# EAGLE board MainNode328V1.0 Rev final (EAGLE 7.1.0)
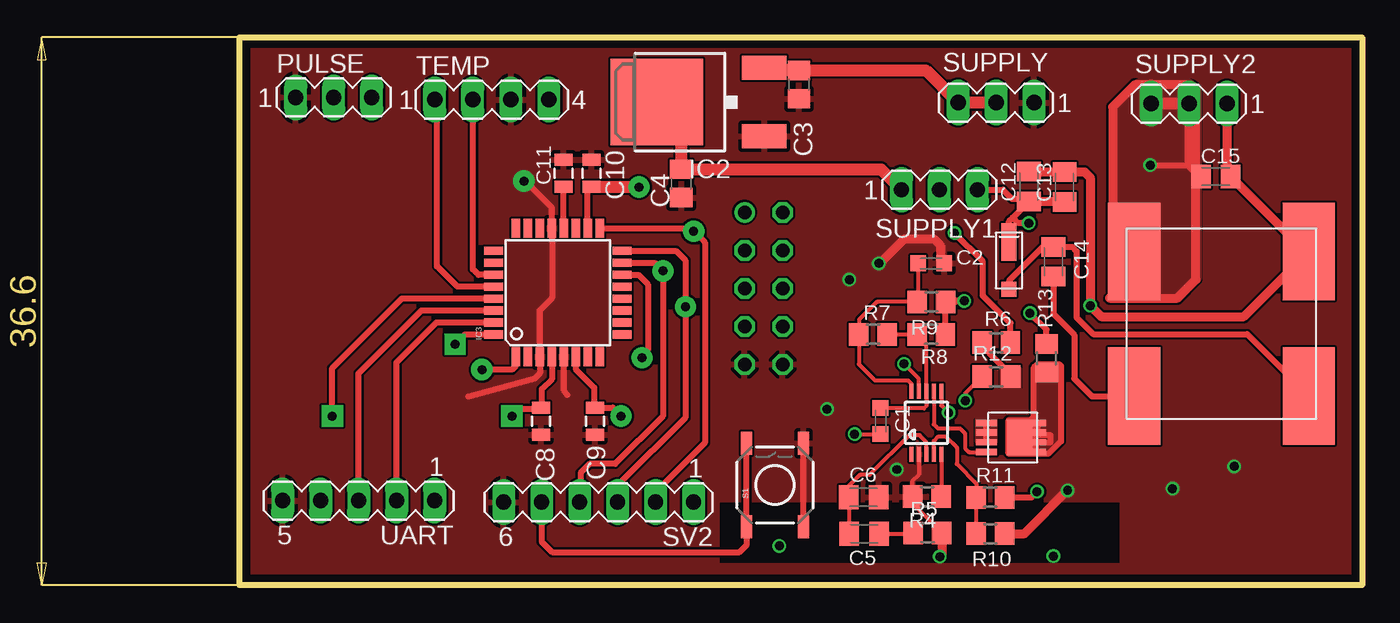
[diagram p0: board, top side]
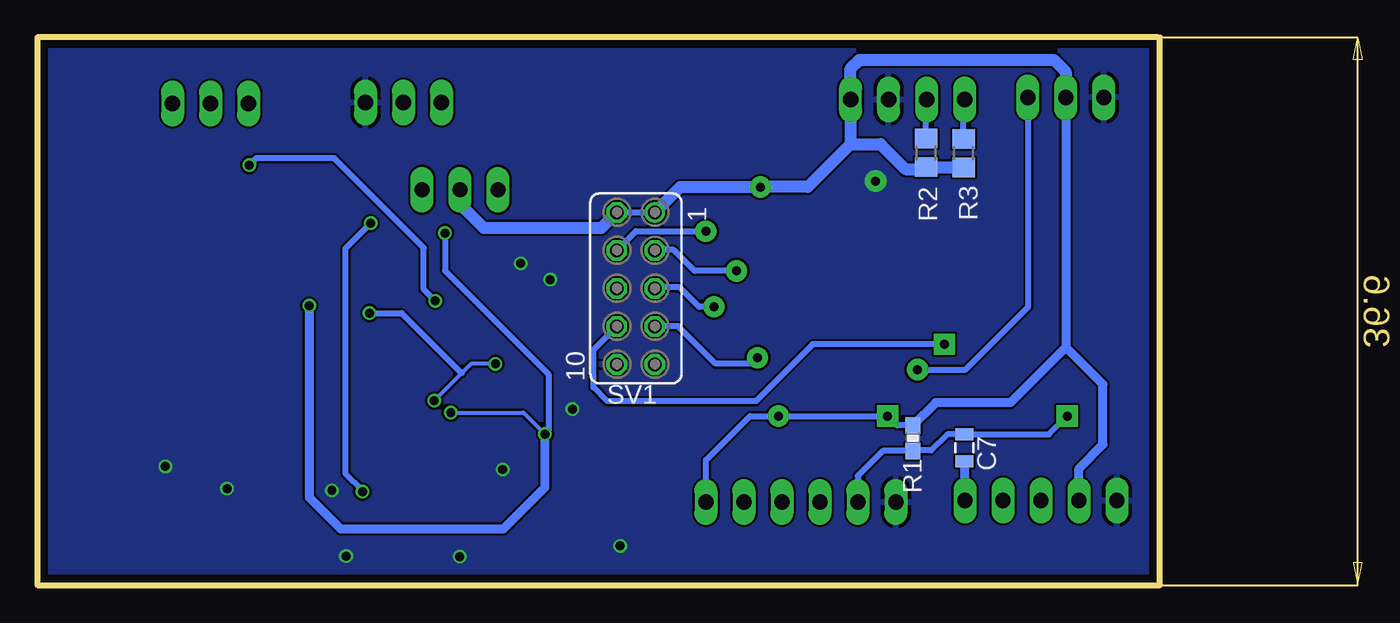
[diagram p1: board, bottom side, seen from below]

Size 75.04 x 36.6 mm. Coordinates in mm from the lower left corner, seen from the top.
Outline: 0,0.5 0,36.6 0,0 75.03,0 75.03,36.6 0.1,36.6
Copper layers (1*16): Top 0.035mm / dielectric 1.6mm / Bottom 0.035mm
Design rules "Elecrow_2-layer_PCB_eagle_rule": minimum track width 6mil, minimum drill 12mil, track to track 6mil, track to pad 8mil, pad to pad 12mil, via to via 12mil, smd to smd 0mil, copper to edge 20mil, drill to drill 10mil, minimum pad ring 6mil, minimum via ring 6mil, stop-mask expansion 0mil, vias tented up to drill 100mil, thermal gap 10mil
tRestrict: area 32.1,1.5 to 58.8,5.5

## Footprints (pad centres in the part's own frame; a part is rotated, then mirrored left to right if it is on the bottom)
C0603K = smd 1.05 x 1.08: 1 -0.875,0; 2 0.875,0
C0805 = smd 1.3 x 1.5: 1 -0.95,0; 2 0.95,0
C0805K = smd 1.3 x 1.6: 1 -1,0; 2 1,0
0805 = smd 0.8 x 1.2: 1 -0.9,0; 2 0.9,0
DPACK = smd 1.6 x 3: 1 -2.28,-4.8; 3 2.28,-4.8 | smd 5.8 x 6.2: 2 0,2.38
TQFP32-08 = smd 1.27 x 0.559: 1 -4.293,2.8; 2 -4.293,2; 3 -4.293,1.2; 4 -4.293,0.4; 5 -4.293,-0.4; 6 -4.293,-1.2; 7 -4.293,-2; 8 -4.293,-2.8; 17 4.293,-2.8; 18 4.293,-2; 19 4.293,-1.2; 20 4.293,-0.4; 21 4.293,0.4; 22 4.293,1.2; 23 4.293,2; 24 4.293,2.8 | smd 0.559 x 1.27: 9 -2.8,-4.293; 10 -2,-4.293; 11 -1.2,-4.293; 12 -0.4,-4.293; 13 0.4,-4.293; 14 1.2,-4.293; 15 2,-4.293; 16 2.8,-4.293; 25 2.8,4.293; 26 2,4.293; 27 1.2,4.293; 28 0.4,4.293; 29 -0.4,4.293; 30 -1.2,4.293; 31 -2,4.293; 32 -2.8,4.293
MA03-1 = drill 1.016 long: 1 -2.54,0; 2 0,0; 3 2.54,0
0603-RES = smd 1.1 x 1: 1 -0.85,0; 2 0.85,0
R0805 = smd 1.3 x 1.5: 1 -0.95,0; 2 0.95,0
TACTILE-SWITCH-SMD = smd 1.524 x 0.762: 1 -2.794,1.905; 2 2.794,1.905; 3 -2.794,-1.905; 4 2.794,-1.905
FE05-2 = drill 0.914: 1 -5.08,1.27 | drill 0.914 octagon: 2 -5.08,-1.27; 3 -2.54,1.27; 4 -2.54,-1.27; 5 0,1.27; 6 0,-1.27; 7 2.54,1.27; 8 2.54,-1.27; 9 5.08,1.27; 10 5.08,-1.27
MA06-1 = drill 1.016 long: 1 -6.35,0; 2 -3.81,0; 3 -1.27,0; 4 1.27,0; 5 3.81,0; 6 6.35,0
MA04-1 = drill 1.016 long: 1 -3.81,0; 2 -1.27,0; 3 1.27,0; 4 3.81,0
MSOP10 = smd 0.25 x 1: 1 -1,-2.113; 2 -0.5,-2.113; 3 0,-2.113; 4 0.5,-2.113; 5 1,-2.113; 6 1,2.113; 7 0.5,2.113; 8 0,2.113; 9 -0.5,2.113; 10 -1,2.113
DI123 = smd 1 x 1: A -1.925,0 | smd 2.5 x 1: C 1.25,0
PP8-3X3 = smd 0.42 x 1.4: 1 -0.975,-1.75; 2 -0.325,-1.75; 3 0.325,-1.75; 4 0.975,-1.75; 5 0.975,1.525; 6 0.325,1.525; 7 -0.325,1.525; 8 -0.975,1.525 | smd 2.37 x 1.7: 9 0,0.45
INDUCTOR = smd 6.5 x 3.5: 1 4.825,5.84; 2 -4.825,5.84; 3 -4.825,-5.84; 4 4.825,-5.84
MA05-1 = drill 1.016 long: 1 -5.08,0; 2 -2.54,0; 3 0,0; 4 2.54,0; 5 5.08,0

## Placement (x,y rotation side)
C1  [C0603K]  42.84,10.96 270 top
C2  [C0603K]  46.23,21.51 0 top
C3  10uF  [C0805]  37.39,33.45 270 top
C4  22uF  [C0805]  29.53,26.84 270 top
C5  [C0805K]  41.75,3.45 0 top
C6  [C0805K]  41.73,5.88 0 top
C7  0.1uF  [0805]  13.06,9.18 270 bottom
C8  0.1uF  [0805]  20.15,10.95 270 top
C9  0.1uF  [0805]  23.75,10.96 270 top
C10  0.1uF  [0805]  23.53,27.51 90 top
C11  0.1uF  [0805]  21.64,27.51 90 top
C12  [C0805K]  52.76,26.63 90 top
C13  [C0805K]  55.15,26.61 90 top
C14  [C0805K]  54.39,21.61 90 top
C15  [C0805K]  65.26,27.3 0 top
IC2  L1117  [DPACK]  30.27,32.28 90 top
IC3  ATMEGA328P  [TQFP32-08]  21.27,19.54 90 top
PULSE  [MA03-1]  6.29,32.59 0 top
R1  10K  [0603-RES]  16.51,9.82 90 bottom
R2  [R0805]  15.63,28.88 270 bottom
R3  [R0805]  13.13,28.86 270 bottom
R4  [R0805]  45.96,5.92 0 top
R5  [R0805]  45.99,3.49 180 top
R6  [R0805]  50.58,16.2 180 top
R7  [R0805]  42.35,16.75 180 top
R8  [R0805]  46.23,16.76 180 top
R9  [R0805]  46.24,18.93 180 top
R10  [R0805]  50.18,3.45 180 top
R11  [R0805]  50.18,5.86 0 top
R12  [R0805]  50.58,13.93 180 top
R13  [R0805]  53.94,15.16 90 top
S1  TAC_SWITCHSMD  [TACTILE-SWITCH-SMD]  35.79,6.69 90 top
SUPPLY  [MA03-1]  50.57,32.25 180 top
SUPPLY1  [MA03-1]  46.79,26.42 0 top
SUPPLY2  [MA03-1]  63.46,32.18 180 top
SV1  [FE05-2]  35.03,19.83 270 bottom
SV2  [MA06-1]  24,5.55 180 top
TEMP  [MA04-1]  16.86,32.45 0 top
U$1  ADP1621  [MSOP10]  45.91,10.85 0 top
U$2  DFLS230LH  [DI123]  51.43,21.69 90 top
U$3  FDMC8651  [PP8-3X3]  51.68,9.87 270 top
U$4  P0175NL  [INDUCTOR]  65.63,17.47 90 top
UART  [MA05-1]  7.95,5.65 180 top

## Library data of the parts
C1 C2 C5 C6 C12-C15 R4-R13 = rcl
C3 C4 = rcl; MPN: 06034D106MAT2A; OC_NEWARK: 10R5934
C7-C11 = SparkFun-Capacitors; OC_NEWARK: unknown
IC2 = e-gizmo
IC3 = SparkFun-DigitalIC; PROD_ID: IC-09069
PULSE SUPPLY SUPPLY1 SUPPLY2 SV2 TEMP UART = con-lstb; OC_FARNELL: unknown; OC_NEWARK: unknown
R1 = SparkFun-Passives; OC_NEWARK: unknown
R2 R3 = resistor
S1 = SparkFun-Retired; OC_NEWARK: unknown; PROD_ID: SWCH-08247
SV1 = con-lsta; OC_FARNELL: unknown; OC_NEWARK: unknown
U$1-U$4 = IC

## Nets
!CCSS: IC3.14 SV1.7
+3V3: C12.1 C13.1 R11.2 SUPPLY1.3 U$2.C
ADC0: IC3.23
ADC1: IC3.24
ADC2: IC3.25
ADC3: IC3.26
AGND: C1.2 C12.2 C13.2 C15.2 R6.1 SUPPLY2.1 U$1.6 U$4.4
AREF: C11.1 IC3.20
DTR: C7.2 UART.1
GD02: SV1.6
GDO0: IC3.32 SV1.8
GND: C2.2 C3.2 C4.2 C6.2 C8.2 C9.2 C10.2 C11.2 IC2.1 IC3.3 IC3.5 IC3.21 PULSE.1 R4.1 R5.1 R10.1 S1.3 S1.4 SUPPLY.1 SV1.9 SV1.10 SV2.6 TEMP.3 U$1.2 UART.5
LED0: IC3.13
LED1: IC3.19
LED2: IC3.22
MISO: IC3.16 SV1.5 SV2.3
MOSI: IC3.15 SV1.3 SV2.4
N$12: R4.2 U$1.5
N$13: C2.1 R7.2 R9.2 U$1.10
N$14: C1.1 R7.1 R8.2 U$1.8
N$15: R10.2 R11.1 U$1.4
N$16: R6.2 R12.1 U$3.1 U$3.2 U$3.3
N$20: R12.2 R13.2 U$1.9
N$22: U$1.7 U$3.4
N$23: R13.1 U$3.5 U$3.6 U$3.7 U$3.8 U$3.9
N$24: C5.1 C6.1 U$1.3
N$25: C5.2 R5.2
N$27: C14.1 U$4.2
N$28: C14.2 U$2.A U$4.3
PULSE: IC3.1 PULSE.3
RESET: C7.1 IC3.29 R1.1 S1.1 S1.2 SV2.5
RX: IC3.30 UART.3
SCK: IC3.17 SV1.4 SV2.2
SCL: IC3.28 R3.1 TEMP.1
SDA: IC3.27 R2.1 TEMP.2
TX: IC3.31 UART.2
V+: C15.1 R8.1 R9.1 SUPPLY2.2 SUPPLY2.3 U$4.1
VCC: C8.1 C9.1 C10.1 IC3.4 IC3.6 IC3.18 PULSE.2 R1.2 R2.2 R3.2 SUPPLY1.2 SV1.1 SV1.2 SV2.1 TEMP.4 UART.4
VDD: C4.1 IC2.2 SUPPLY1.1
VIN: C3.1 IC2.3 SUPPLY.2 SUPPLY.3
XTAL1: IC3.7
XTAL2: IC3.8

## Tracks (layer width: path | path; a pad name or v marks a point on that pad's centre or on a via)
!CCSS  (via drill 0.6 pad 1.42)
  Top 0.406: IC3.14 26.66,20.74 27.3,20.1 27.3,15.7 v26.9,15.2
  Bottom 0.406: v26.9,15.2 27.3,14.8 29.7,14.8 32.2,17.3 SV1.7
+3V3  (via drill 0.6)
  Top 0.406: U$2.C 51.43,24.31 51.68,24.55 | 51.68,24.55 C12.1 52.58,25.82 51.63,25.82 51.02,26.42 SUPPLY1.3 | R11.2 52.93,5.86 v53.31,6.25 | v52.76,24.19 52.04,24.19 51.68,24.55
  Top 0.61: C13.1 52.78,25.61 C12.1
  Bottom 0.406: v53.31,6.25 53.31,6.33 54.44,7.46 54.44,22.51 v52.76,24.19
AGND  (via drill 0.6)
  Top 0.254: U$1.6 46.91,12.02 v47.4,11.53 | v41.1,10.09 C1.2 | C1.2
  Top 0.406: R6.1 51.52,17.51 49.68,19.35 49.68,21.64 v47.79,23.53
  Top 0.61: SUPPLY2.1 66,27.56 C15.2 71.27,22.29 U$4.4 67.12,17.94 57.59,17.94 v56.86,18.68 56.86,27.24 56.48,27.61 C13.2 55.12,27.63 C12.2
  Bottom 0.254: v47.4,11.53 42.54,11.53 v41.1,10.09
  Bottom 0.406: v47.79,23.53 47.79,21.02 40.87,14.1 40.87,10.32 v41.1,10.09
  Bottom 0.61: v56.86,18.68 56.86,5.87 54.75,3.76 43.88,3.76 41.11,6.54 v41.11,10.08 v41.1,10.09
AREF
  Top 0.406: IC3.20 21.67,26.58 C11.1
DTR
  Bottom 0.61: UART.1 13.03,8.25 C7.2
GDO0  (via drill 0.6 pad 1.42)
  Top 0.406: IC3.32 15.04,16.74 v14.4,16.1
  Bottom 0.406: v14.4,16.1 23.2,16.1 27,12.3 36.95,12.3 37.86,13.21 37.86,15.73 SV1.8
GND  (via drill 0.6, 0.6 pad 1.42)
  Top 0.254: U$1.2 45.41,7.39 44.95,6.93 44.95,5.97 R4.1 45.01,5.42 R5.1
  Top 0.406: S1.3 S1.4 | IC3.5 21.67,13.03 21.9,12.7 | 15.3,12.6 19.7,13.8 20.07,14.17 IC3.3 20.07,18.37 20.87,19.17 IC3.21 20.87,25.23 19,27.1
  Top 0.61: R10.1 52.47,3.45 v55.35,6.33 | R5.1 46.94,2.04 v46.81,1.91 | v42.72,21.5 42.81,21.5 44.45,23.14 46.4,23.14 46.84,22.7 46.84,21.77 C2.2
  other vias: 19,27 62.36,6.44 66.49,7.94 36.07,2.63 39.27,11.75 40.76,20.42 43.93,7.73 54.4,1.94
  pour Top: 74.98,36.65 74.98,-0.73 -0.4,-0.3 -0.4,36.88
  pour Bottom: 74.98,36.65 74.98,-0.73 -0.4,-0.3 -0.4,36.88
MISO  (via drill 0.6 pad 1.42)
  Top 0.406: IC3.16 29.16,22.34 29.8,21.7 v29.8,18.6 29.8,11.2 25.4,6.8 25.4,5.88 SV2.3
  Bottom 0.406: v29.8,18.6 30.8,18.6 32.1,19.9 33.69,19.9 SV1.5
MOSI  (via drill 0.6 pad 1.42)
  Top 0.406: IC3.15 27.76,21.54 v28.3,21 28.3,11.3 25.1,8.1 23.4,8.1 22.8,7.5 22.8,5.48 SV2.4
  Bottom 0.406: v28.3,21 31.1,21 32.5,22.4 33.73,22.4 SV1.3
N$12
  Top 0.254: U$1.5 46.91,5.58 46.74,5.42 46.74,5.75 R4.2
N$13
  Top 0.254: U$1.10 44.91,13.45 44.69,13.68 42.48,13.68 41.4,14.76 R7.2 41.41,16.77 41.41,17.73 42.61,18.93 R9.2 45.35,19.55 C2.1
N$14
  Top 0.254: C1.1 43.28,11.81 45.76,11.81 45.91,11.96 U$1.8 45.91,16.13 R8.2 R7.1
N$15
  Top 0.254: U$1.4 46.41,9.63 46.73,9.94 47.2,9.94 47.93,9.21 47.93,8.09 49.24,6.79 49.24,5.87 R11.1 R10.2
N$16
  Top 0.406: U$3.3 U$3.2 U$3.1 | R12.1 51.53,14.09 50.15,15.47 50.15,15.68 R6.2
  pour Top (no thermals): 49.36,9.54 49.36,11.12 49.36,11.13 50.99,12.76 50.99,14.46 51.07,14.54 52.02,14.54 52.09,14.46 52.09,12.79 50.48,11.17 50.44,11.17 50.44,9.54
N$20  (via drill 0.6)
  Top 0.254: U$1.9 45.41,13.79 v44.41,14.79 | v48.51,12.33 48.51,12.81 R12.2
  Top 0.406: R13.2 53.94,17.08 v52.84,18.18
  Bottom 0.254: v44.41,14.79 46.05,14.79 46.67,14.17 v48.51,12.33
  Bottom 0.406: 46.67,14.17 50.69,18.18 v52.84,18.18
N$22
  Top 0.254: U$3.4 48.76,8.89 48.49,9.16 48.49,10.13 48.16,10.47 46.68,10.47 46.41,10.74 U$1.7
N$23
  Top 0.406: 51.4,11.01 52.85,11.01 | 52.85,11.01 53.11,11.27 53.11,14.54 53.32,14.75 54.8,14.75 54.9,14.65 54.9,9.61 54.08,8.78 51.42,8.78 51.4,8.8 51.4,11 51.4,11.01 | U$3.9 52.13,10.98 53.01,10.98 53.01,10.27 53.35,10.27 53.35,10.3 53.22,10.3 | 52.85,11.01 52.85,10.83 53.13,10.83 53.13,10.22 53.19,10.22 53.19,9.46 53.23,9.46 53.23,8.87 53.2,8.87 53.2,9.55 54.22,9.55 54.22,10.01 53.19,10.01 53.19,10.72 53.2,10.72 53.2,10.82 53.28,10.82 53.28,10.53 53.33,10.53 53.33,10.28 53.24,10.28 53.24,10.11 53.21,10.11 53.21,10.1 53.02,10.1 53.02,10.22 52.92,10.22 52.92,10.38 52.88,10.38 | U$3.7 53.21,10.25 53.22,10.25 53.22,10.47 53.04,10.47
  pour Top (no thermals): 51.44,8.78 54.07,8.78 54.93,9.64 54.93,14.62 54.8,14.75 53.32,14.75 53.12,14.54 53.12,11.28 52.89,11.05 51.44,11.05
N$24
  Top 0.254: U$1.3 45.91,9.56 45.45,10.02 44.76,10.02 42.11,7.37 41.47,7.37 40.68,6.58 40.68,5.93 C6.1 40.76,5.86 C5.1
N$25
  Top 0.254: C5.2 44.99,3.45 R5.2
N$27
  Top 0.406: C14.1 54.39,18.12 55.79,16.72 55.79,13.81 56.98,12.62 59.77,12.62 U$4.2
N$28
  Top 0.406: U$4.3 67.35,16.77 57.06,16.77 55.94,17.88 55.94,22.33 55.66,22.61 C14.2 53.7,22.61 51.43,20.34 U$2.A
PULSE  (via drill 0.6 pad 1.42)
  Top 0.406: IC3.1 18.47,14.67 18.2,14.4 v16.2,14.4
  Bottom 0.406: v16.2,14.4 13,14.4 8.8,18.6 8.8,32.56 PULSE.3
RESET  (via drill 0.6 pad 1.42)
  Top 0.406: IC3.29 10.84,19.14 6.2,14.5 v6.2,11.3 | SV2.5 20.19,2.91 20.9,2.2 33.4,2.2 33.9,2.7 33.9,3.88 S1.1 S1.2
  Bottom 0.406: v6.2,11.3 7.42,10.08 C7.1 14.22,10.08 15.3,9 16.48,9 R1.1 18.53,8.97 20.2,7.3 20.2,5.64 SV2.5
RX
  Top 0.406: IC3.30 12.14,18.34 7.95,14.15 UART.3
SCK  (via drill 0.6 pad 1.42)
  Top 0.406: IC3.17 30.17,23.83 v30.35,23.65 31.1,22.9 31.1,9.5 27.8,6.2 27.8,5.76 SV2.2
  Bottom 0.406: SV1.4 35.02,23.65 v30.35,23.65
SCL
  Top 0.406: IC3.28 14.56,19.94 13.2,21.3 13.2,32.3 TEMP.1
  Bottom 0.406: R3.1 13.13,32.37 TEMP.1
SDA
  Top 0.406: IC3.27 15.96,20.74 15.6,21.1 TEMP.2
  Bottom 0.406: R2.1 15.63,32.41 TEMP.2
TX
  Top 0.406: IC3.31 13.14,17.54 10.49,14.89 UART.2
V+  (via drill 0.6)
  Top 0.406: R8.1 47.18,18.92 R9.1 | R9.1 47.88,18.93 | v60.87,28.07 63.49,28.07 C15.1 | v48.44,18.99 47.26,18.99 R9.1
  Top 0.61: SUPPLY2.2 63.46,28.1 C15.1 | 58.17,19.17 62.67,19.17 63.92,20.42 63.92,32.86 63.36,33.43 59.83,33.43 58.37,31.97 58.37,19.36 58.18,19.17 | U$4.1 59.71,22.29 59.66,22.25 59.78,22.25 59.83,22.2 59.83,22.39 59.86,22.42 59.91,22.42 60.22,22.1 60.12,22.1 59.71,21.7 58.99,21.7 58.68,21.38 59.45,21.38 59.88,21.82
  Top 0.813: SUPPLY2.2 SUPPLY2.3
  Bottom 0.406: v60.87,28.07 60.41,28.53 55.19,28.53 49.2,22.54 49.2,19.75 v48.44,18.99
  pour Top (no thermals): 58.38,19.2 62.73,19.2 64.04,20.51 64.04,33 63.48,33.57 60.08,33.57 58.46,31.94 58.46,19.28 58.38,19.2
VCC  (via drill 0.6 pad 1.42)
  Top 0.406: IC3.4 20.87,13.77 20.2,13.1 20.2,11.9 C8.1 20.1,11.8 18.7,11.8 v18.2,11.3 | IC3.6 22.47,14.43 23.7,13.2 23.7,11.91 C9.1 24.94,11.86 v25.5,11.3 | IC3.18 23.27,26.35 C10.1
  Top 0.813: C10.1 v26.69,26.61 v26.7,26.6
  Bottom 0.406: SV1.2 SV1.1 | SV2.1 30.35,8.35 27.4,11.3 v25.5,11.3 v18.2,11.3 17.57,10.67 R1.2
  Bottom 0.61: PULSE.2 6.29,15.91 | 6.29,15.91 10,12.2 14.98,12.2 R1.2 | UART.4 5.41,7.79 3.8,9.4 3.8,13.42 6.29,15.91
  Bottom 0.813: SV1.1 32.07,26.6 v26.7,26.6 v26.69,26.61 C10.1 20.67,29.47 | 20.67,29.47 TEMP.4 20.67,34.53 20.1,35.1 7.1,35.1 6.3,34.3 PULSE.2 | 20.67,29.47 18.67,29.47 17,27.8 15.76,27.8 R2.2 13.15,27.93 R3.2 | SUPPLY1.2 46.79,25.47 45.2,23.88 37.33,23.88 SV1.2
VDD
  Top 0.813: IC2.2 29.53,30.64 C4.1 42.88,27.79 SUPPLY1.1
VIN
  Top 0.813: IC2.3 35.23,34.4 C3.1 45.88,34.4 SUPPLY.3 SUPPLY.2